# Altium PCB PCB1.PcbDoc
Units mil, origin at the board's own origin, x right, y up, seen from the top; angles counter-clockwise.
Board outline 4018 x 2501 mil, 2 copper layers (Top Layer, Bottom Layer); 20 components, 9 nets, 57 pads, 0 vias.
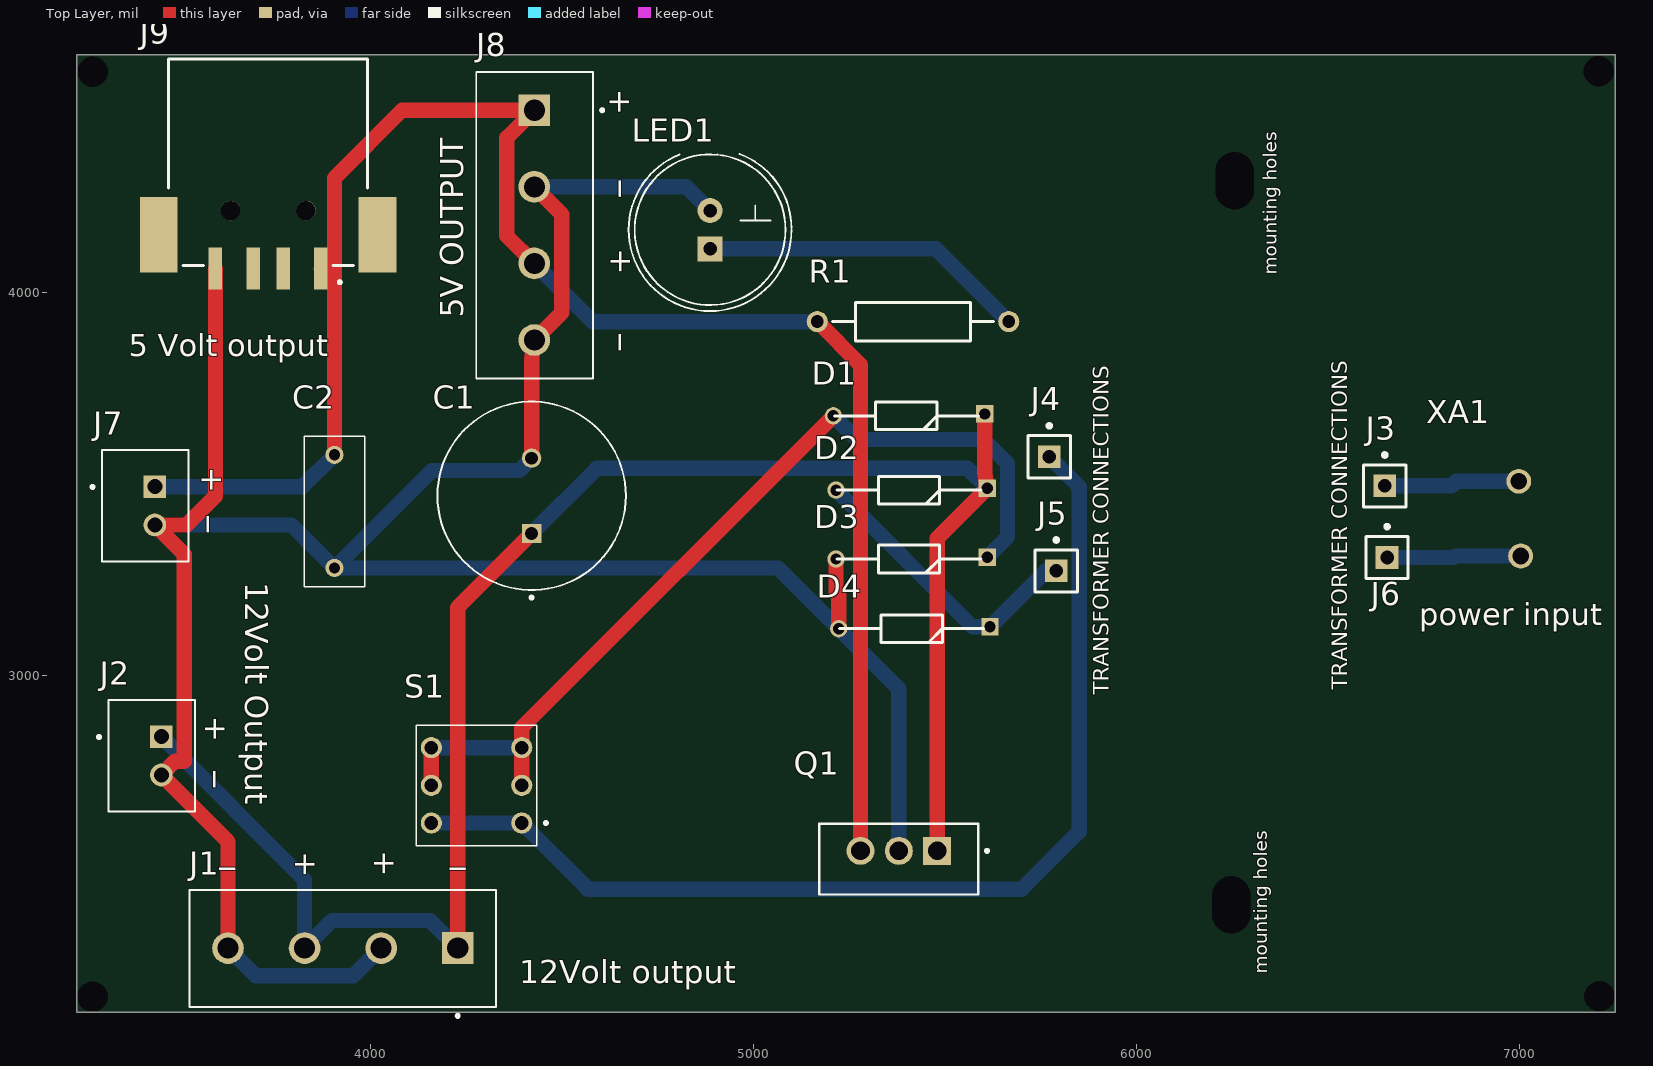
[diagram p0: Top Layer view]
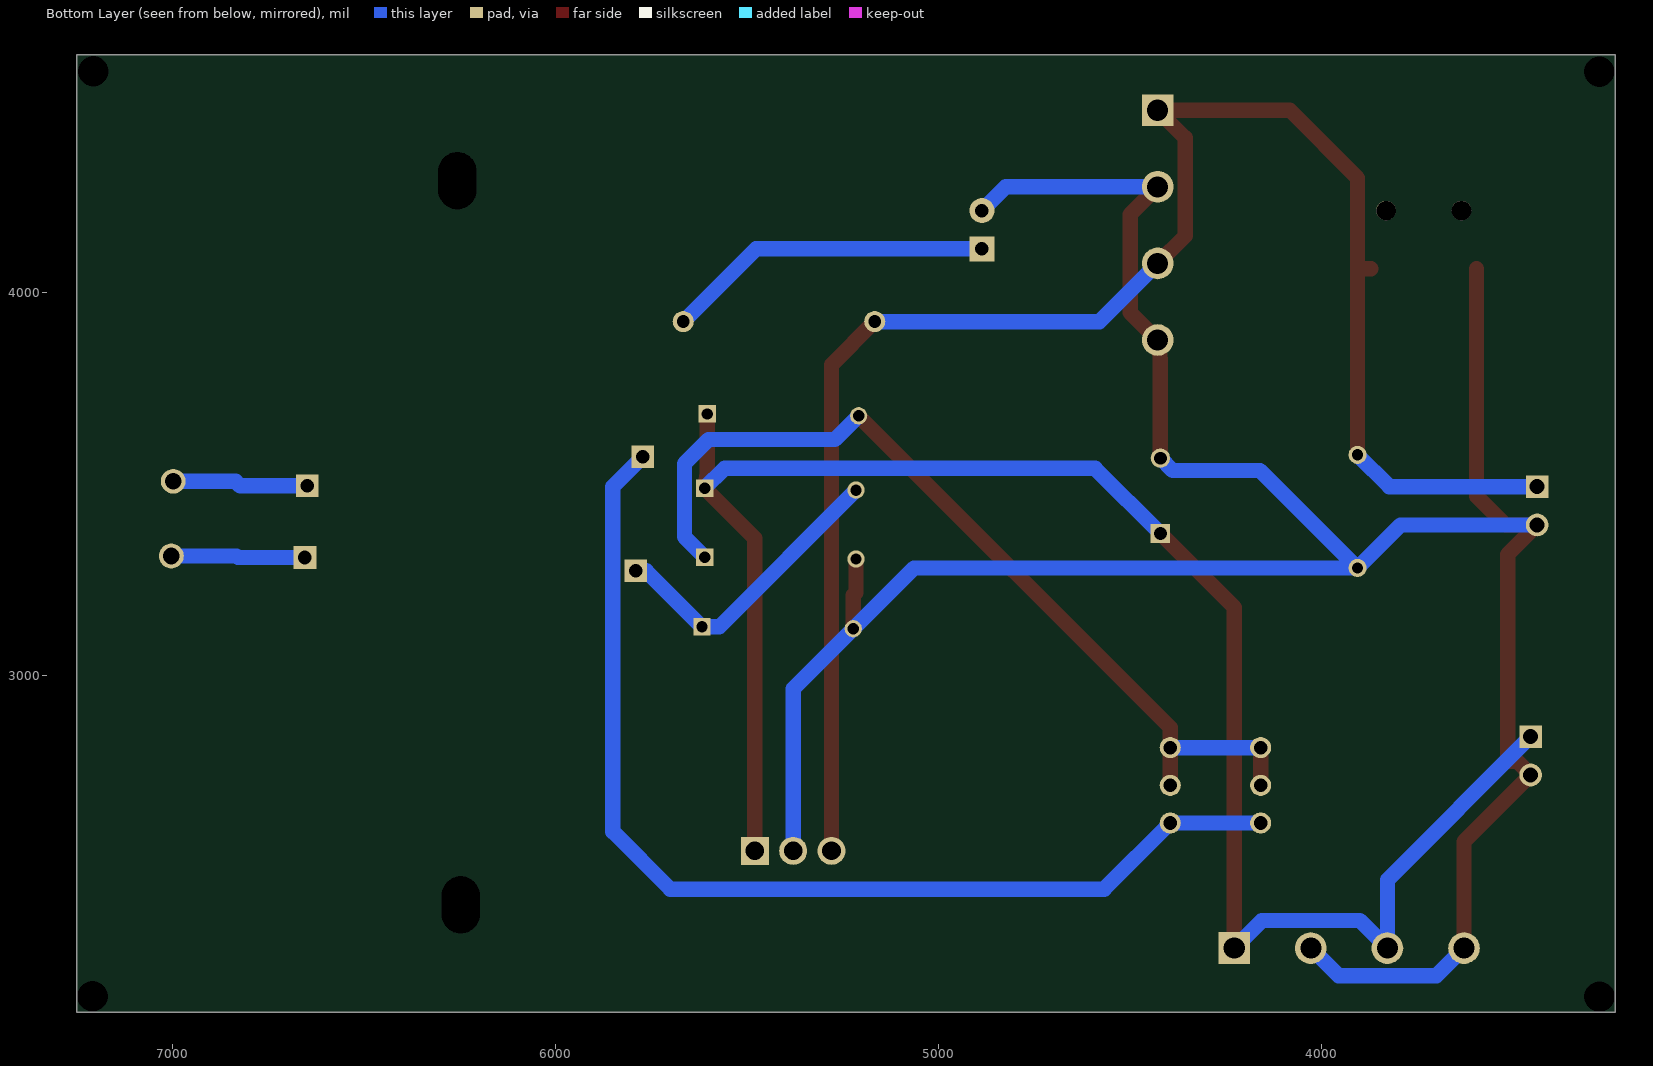
[diagram p1: Bottom Layer view, seen from below]
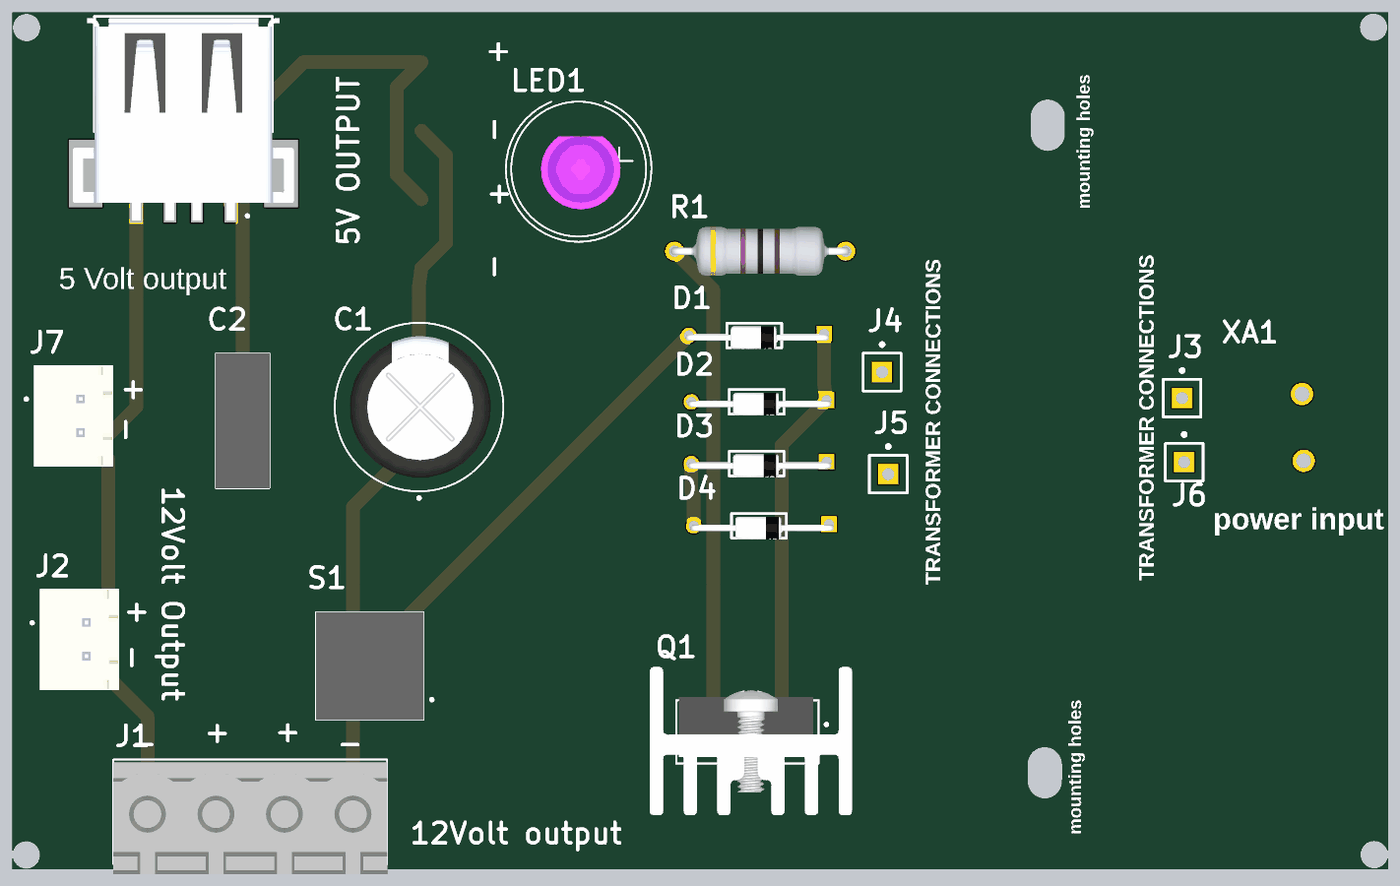
[diagram p2: 3D render of the assembled board from above, using the file's embedded part models]

## Layer stack, top to bottom
Top Solder: solder mask 0.4, Solder Resist, Dk 3.5
Top Layer: signal copper 1.4
Dielectric 1: dielectric 12.6, FR-4, Dk 4.8
Bottom Layer: signal copper 1.4
Bottom Solder: solder mask 0.4, Solder Resist, Dk 3.5

## Board outline
3232,2121 7250,2121 7250,4622 3232,4622

## Design rules (kind name [scope] priority, off if disabled: settings)
Clearance [All] p1: gap=10 ignorepadtopadclearanceinfootprint=FALSE except(0: Arc-Hole Track-Hole SMDPad-Hole THPad-Hole Via-Hole Fill-Hole Poly-Hole Region-Hole Text-Hole)
PolygonConnect [All] p1: connectstyle=Relief reliefconductorwidth=10 reliefentries=4 polygonreliefangle="90 Angle" airgapwidth=10
RoutingVias [All] p1: holewidth=28 width=50 viastyle="Through Hole" minholewidth=28 minwidth=50 maxholewidth=28 maxwidth=50
SolderMaskExpansion [All] p1: expansion=4
Width [All] p1: maxlimit=40 minlimit=40 preferedwidth=40 minimp=50.000000 maximp=50.000000 favimp=50.000000
30 further rules are at their usual default settings.

## Components (designator, comment, footprint, x,y, rotation, side; value= is the part's Value field where it differs from the comment)
C1 "1000uF 16v" CAPPRD500W60D1330H2700 4420,3470 r90 top
C2 "104pF" B32520C3104K000 3905,3281.72 r90 top
D1 "1N4007" DIOAD1138W56L406D183 5623,3679 r180 top
D2 "1N4007" DIOAD1138W56L406D183 5630,3485 r180 top
D3 "1N4007" DIOAD1138W56L406D183 5630,3305 r180 top
D4 "1N4007" DIOAD1138W56L406D183 5637,3123 r180 top
J1 "282825-4" TE_282825-4 4577,2719 r180 top
J2 "12volt connector" JST_B2B-XH-A(LF)(SN) 3428,2791 r270 top
J3 "Socket" PIN1 6648,3496 r0 top
J4 "Socket" PIN1 5772,3572 r0 top
J5 "Socket" PIN1 5790,3274 r0 top
J6 "Socket" PIN1 6654,3309 r0 top
J7 "5v connector" JST_B2B-XH-A(LF)(SN) 3411,3444 r270 top
J8 "282825-4" TE_282825-4 3997,4827 r270 top
J9 "USB-A-S-X-X-SM2" SAMTEC_USB-A-S-X-X-SM2 3732,4215 r180 top
LED1 "LED" LED2-2.54-D10MM 4886,4164.99 r90 top
Q1 "LM7805CT/NOPB" TO254P1054X470X2600-3 5479,2543 r180 top
R1 "" AXIAL-0.5 5416,3925 r180 top value=5.6K
S1 "6pin button" MPSA22E080150 4289.89,2714 r90 top
XA1 "connector" PHOENIX_MKDS1/2-3.81 6993,3413 r90 top

## Footprints (in the part's own frame and the unit in brackets; to place one, negate y for a bottom-side part, rotate by r counter-clockwise, add the part's x,y. Pads: shape width x height; smd on the part's side, far side on the other; paste and mask are expansions set on the pad)
AXIAL-0.5 [mm] "Axial Device, Thru-Hole; 2 Leads; 0.5 in Pin Spacing"
  round 1.4 hole 0.85: 1(-6.35,0) 2(6.35,0)
  silkscreen extent -5.33,-1.27 5.33,1.27, body extent -6.62,-1.8 6.63,1.8, height 6.1
B32520C3104K000 [mm]
  round 1.2 hole 0.75: 1(0,0) 2(7.5,0)
  silkscreen extent -1.25,-2 8.75,2, body extent -1.25,-2 8.75,2, height 8.6
CAPPRD500W60D1330H2700 [mm]
  rect 1.28x1.28 hole 0.85: 1(-2.5,0)
  round 1.28 hole 0.85: 2(2.5,0)
  silkscreen extent -6.85,-6.25 6.25,6.25, body extent -5.25,-5.33 5.25,5.16, height 17.5
DIOAD1138W56L406D183 [mm]
  rect 1.15x1.15 hole 0.75: 1(0.508,-0.127)
  round 1.15 hole 0.75: 2(10.541,0)
  silkscreen extent 0.93,-0.92 10.48,0.92, body extent 0.15,-0.69 10.77,1.02, height 2.12
JST_B2B-XH-A(LF)(SN) [mm]
  rect 1.508x1.508 hole 1: 1(-1.27,0.635)
  round 1.508 hole 1: 2(1.27,0.635)
  silkscreen extent -3.7,-3.6 3.7,2.88, body extent -3.72,-2.88 3.68,2.87, height 7
LED2-2.54-D10MM [mil]
  round 65 hole 35: NEG(49.99,0)
  rect 65x65 hole 35: POS(-49.99,0)
  silkscreen extent -213,-213 197,213, body extent -118,-122 95,110, height 362
MPSA22E080150 [mm]
  round 1.4 hole 0.9: 1(-2.5,-2.65) 2(0,-2.65) 3(2.5,-2.65) 4(-2.5,3.35) 5(0,3.35) 6(2.5,3.35)
  silkscreen extent -4,-4.35 4,4.35, body extent -4,-3.65 4,4.35, height 8.1
PHOENIX_MKDS1/2-3.81 [mm]
  round 1.65 hole 1.1: 1(-2.54,-0.254) 2(2.413,-0.127)
  body extent -5.08,-6.25 5.52,6.25, height 12.5
PIN1 [mm] "Connector; Plug"
  rect 1.5x1.5 hole 0.9: 1(0,0)
  silkscreen extent -1.4,-1.4 1.4,2.17
SAMTEC_USB-A-S-X-X-SM2 [mm]
  rrect4% 0.9x2.8 smd: 01(-3.5,3.85) 02(-1,3.85) 03(1,3.85) 04(3.5,3.85)
  rect 2.5x5 smd: S1(-7.25,1.6) S2(7.25,1.6)
  round 1.3 hole 1.3 unplated: ""(-2.5,0) ""(2.5,0)
  silkscreen extent -6.6,-10.05 6.6,4.85, body extent -8.2,-9.91 8.2,5.09, height 7.79
TE_282825-4 [mm]
  rect 2.1x2.1 hole 1.4: 1(8.89,10.922)
  round 2.1 hole 1.4: 2(13.97,10.922) 3(19.05,10.922) 4(24.13,10.922)
  silkscreen extent 6.35,7.07 26.67,15.52, body extent 6.35,7.27 26.67,15.62, height 12.19
TO254P1054X470X2600-3 [mm]
  rect 1.86x1.86 hole 1.24: 1(0,0)
  round 1.86 hole 1.24: 2(2.54,0) 3(5.08,0)
  silkscreen extent -3.41,-1.8 7.81,2.9, body extent -5.21,-4.27 9.79,6.73, height 20

## Part data
C1: library part 478CKS010M, "4700µF 10V Aluminum Electrolytic Capacitors Radial, Can 98.8mOhm @ 120Hz 2000 Hrs @ 85°C", Package="Radial Illinois Capacitor", Availability=Warning, MF="Illinois Capacitor", Mouser-Purchase-URL=https://snapeda.com/shop?store=Mouser&id=2347563, MP=478CKS010M, Price=None, SnapEDA_Link=https://www.snapeda.com/parts/478CKS010M/Illinois%20Capacitor/view-part/2347563/?ref=snap
C2: library part B32520C3104K000, "Capacitor", Manufacturer_Name=TDK, Arrow Part Number=B32520C3104K000, Arrow Price/Stock=https://www.arrow.com/en/products/b32520c3104k000/epcos-tdk, Datasheet Link=https://datasheet.datasheetarchive.com/originals/dk/DKDS41/DSANUWW0037983.pdf, Height=8.5mm, Manufacturer_Part_Number=B32520C3104K000
D1 D2 D3 D4: library part 1N4678__DO35_, "Diode", Manufacturer_Name="Microsemi Corporation", Manufacturer_Part_Number="1N4678 (DO35)", Datasheet Link=https://www.microsemi.com/document-portal/doc_download/5827-1n4678-4717-datasheet
J1 J8: "14 Position Terminal Block Header, Male Pins, Shrouded _2 Side_ 0.200 _5.08mm_ Vertical Through Hole", Package=None, Availability=Unavailable, EU_RoHS_Compliance=Compliant, MF="TE Connectivity", MP=282825-4, Price=None, SnapEDA_Link=https://www.snapeda.com/parts/282825-4/TE%20Connectivity%20AMP%20Connectors/view-part/2375878/?ref=snap, TE_purchase_URL=https://www.te.com/usa-en/product-282825-4.html?te_bu=Cor&te_type=disp&te_campaign=seda_glo_cor-seda-global-disp-prtnr-fy19-seda-model-bom-cta_sma-317_1&elqCampaignId=32493
J2 J7: library part B2B-XH-A(LF)(SN), "Connector Header Through Hole 2 position 0.098 _2.50mm_", Package=None, Availability=Unavailable, MF="JST Sales", MP=B2B-XH-A_LF__SN_, Price=None, SnapEDA_Link=https://www.snapeda.com/parts/B2B-XH-A%28LF%29%28SN%29/JST%20Sales%20America%20Inc./view-part/492310/?ref=snap
J9: "USB-A (USB TYPE-A) USB 2.0 Receptacle Connector 4 Position Surface Mount, Right Angle", Package=None, Availability=Unavailable, DigiKey-Purchase-URL=https://snapeda.com/shop?store=DigiKey&id=937545, MF=Samtec, MP=USB-A-S-F-B-SM2, Price=None, SnapEDA_Link=https://www.snapeda.com/parts/USB-A-S-F-B-SM2/Samtec%20Inc./view-part/937545/?ref=snap, Toby_UK-Purchase-URL=https://snapeda.com/shop?store=Toby+UK&id=937545
LED1: library part DIP-LED-GREEN-VAPOROUS-GREEN-10MM(2P-D10MM), "DIP LED Green-Vaporous Green-10mm", Package=None, Availability=Unavailable, MF=Chengguangxing, MP=G1004DC, Price=None, SnapEDA_Link=https://www.snapeda.com/parts/G1004DC/Chengguangxing/view-part/106403/?ref=snap
Q1: "Linear Voltage Regulator IC 1 Output 1A TO-220-3", Package="TO-220 ON Semiconductor", Availability=Unavailable, MF="ON Semiconductor", MP=LM7805CT, Price=None, SnapEDA_Link=https://www.snapeda.com/parts/LM7805CT/ON%20Semiconductor/view-part/546231/?ref=snap
R1: library part "Res Semi", "Semiconductor Resistor", LatestRevisionDate=17-Jul-2002, LatestRevisionNote="Re-released for DXP Platform.", PackageDescription="Axial Device, Thru-Hole; 2 Leads; 0.5 in Pin Spacing", PackageReference=AXIAL-0.5, Published=8-Jun-2000, Publisher="Altium Limited"
S1: library part MPSA-22E08-0150, "Switch", Manufacturer_Name=KNITTER-SWITCH, Datasheet Link=http://www.knitter-switch.com/eng/Series/17?search=MPSA-22E08-0150, Height=8mm, Manufacturer_Part_Number=MPSA-22E08-0150
XA1: library part MKDS1/2-3.81, "2 Position Wire to Board Terminal Block Horizontal with Board 0.150 _3.81mm_ Through Hole", Package=None, Availability=Unavailable, MF="Phoenix Contact", MP="MKDS 1/ 2-3.81", Price=None, SnapEDA_Link=https://www.snapeda.com/parts/MKDS%201/%202-3.81/Phoenix%20Contact/view-part/114562/?ref=snap
J3 J4 J5 J6: LatestRevisionDate=17-Jul-2002, LatestRevisionNote="Re-released for DXP Platform.", Publisher="Altium Limited"

## Free pads (board coordinates)
  round 60 hole 100 slot 150 at 90 deg unplated: 6(6256,4293) 7(6247,2402)
  round 60 hole 80 unplated: 8(3274,4578) 9(7207,4579) 10(7209,2163) 11(3273,2162)

## Nets (pads, with @x,y where several pads share a name; then routed paths per layer and width w, separated by ;. In a path a pad name is that pad's centre, name@x,y a point inside that pad or via, vN(x,y) a via of type N, cw(c..) or ccw(c..) an arc to the next point about the centre after c; other vN are vias at no path point)
12V: C1.1 D1.1 D2.1 J1.1 J1.3 J2.1 Q1.1 | length 4807
  Top Layer w40: J1.1 4227,3178.57 C1.1 ; Q1.1 5479,3359 D2.1 5603,3534 D1.1
  Bottom Layer w40: J2.1 3827,2467 J1.3 3899,2361 4155,2361 J1.1 ; C1.1 4590.43,3542 5558,3542 D2.1
GND: C1.2 C2.1 D3.2 D4.2 J1.2 J1.4 J2.2 J7.2 J8.2 J8.4 J9.04 LED1.NEG Q1.2 | length 7106.4
  Top Layer w40: J9.04 3594.2,3469.2 3519,3394 J7.2 3513,3317 3513,2777 3489,2777 J2.2 3627,2567 J1.4 ; C1.2 4420,3826 J8.4 4499,3949 4499,4205 J8.2 ; D3.2 5215,3217 5222,3210 D4.2
  Bottom Layer w40: J7.2 3792.72,3394 C2.1 ; J1.4 3699,2217 3955,2217 J1.2 ; C1.2 4388,3536.43 4159.7,3536.43 C2.1 ; J8.2 4823.98,4277 LED1.NEG ; Q1.2 5379,2966 D4.2 5063.28,3281.72 C2.1
NetD1_2: D1.2 D3.1 S1.2 S1.3 S1.5 S1.6 | length 2409.5
  Top Layer w40: S1.5 S1.6 ; S1.2 S1.3 4394.22,2865.22 D1.2
  Bottom Layer w40: S1.6 S1.3 ; D1.2 5270,3617 5600,3617 5663,3554 5663,3363 D3.1
NetD2_2: D2.2 D4.1 J5.1 | length 783.3
  Bottom Layer w40: D2.2 5572,3128 D4.1 5763,3274 J5.1
NetJ3_1: J3.1 XA1.2 | length 355
  Bottom Layer w40: J3.1 6823,3496 6835,3508 XA1.2
NetJ4_1: J4.1 S1.1 S1.4 | length 2836.9
  Bottom Layer w40: S1.4 S1.1 4566.79,2443 5700,2443 5850,2593 5850,3494 J4.1
NetJ6_1: J6.1 XA1.1 | length 350.7
  Bottom Layer w40: J6.1 6829,3309 6833,3313 XA1.1
NetLED1_POS: LED1.POS R1.1 | length 858.7
  Bottom Layer w40: LED1.POS 5476,4115 R1.1
"VCC 5+": C2.2 J7.1 J8.1 J8.3 J9.01 Q1.3 R1.2 | length 4547.3
  Top Layer w40: J9.01 3905,4063.43 ; C2.2 3905,4063.43 ; J8.3 4355,4149 4355,4405 J8.1 4082,4477 3905,4300 3905,4063.43 ; R1.2 5279,3812 Q1.3
  Bottom Layer w40: J7.1 3822,3494 C2.2 ; J8.3 4579,3925 R1.2
pads on no net: J9. J9.02 J9.03 J9.S1 J9.S2

## Silkscreen, mask and mechanical layers (free items; w line width, h text height)
Top Overlay:
  text "+" at 4675,4464 h60 r90
  text "_" at 4635,4251 h60 r90
  text "+" at 4678,4048 h60 r90
  text "mounting holes" at 6378,4048 h60 r90
  text "5V OUTPUT" at 4242,3935 h60 r90
  text "_" at 4635,3850 h60 r90
  text "5 Volt output" at 3368,3815 h100
  text "+" at 3609,3477 h60 r90
  text "_" at 3558,3375 h60 r90
  text "12Volt Output" at 3672,3245 h60 r270
  text "power input" at 6738,3113 h100
  text "TRANSFORMER CONNECTIONS" at 6565,2963 h70 r90
  text "TRANSFORMER CONNECTIONS" at 5942,2950 h70 r90
  text "+" at 3619,2827 h60 r90
  text "_" at 3576,2709 h60 r90
  text "_" at 3646,2479 h60 r180
  text "_" at 4248,2479 h60 r180
  text "+" at 4060,2475 h60 r90
  text "+" at 3854,2473 h60 r90
  text "mounting holes" at 6353,2222 h60 r90
  text "12Volt output" at 4388,2197 h60

## Text inside footprints (layer, text, board x,y; h text height)
J9: Mechanical 13 "PCB EDGE" at 3869.8,4589.02 h40 r180